# Altium PCB psu-usb.PcbDoc
Units mm, origin at the board's own origin, x right, y up, seen from the top; angles counter-clockwise.
Board outline 19.5 x 41.25 mm, 2 copper layers (Top Layer, Bottom Layer), stack 1.581 mm thick; 6 components, 4 nets, 22 pads, 25 vias.
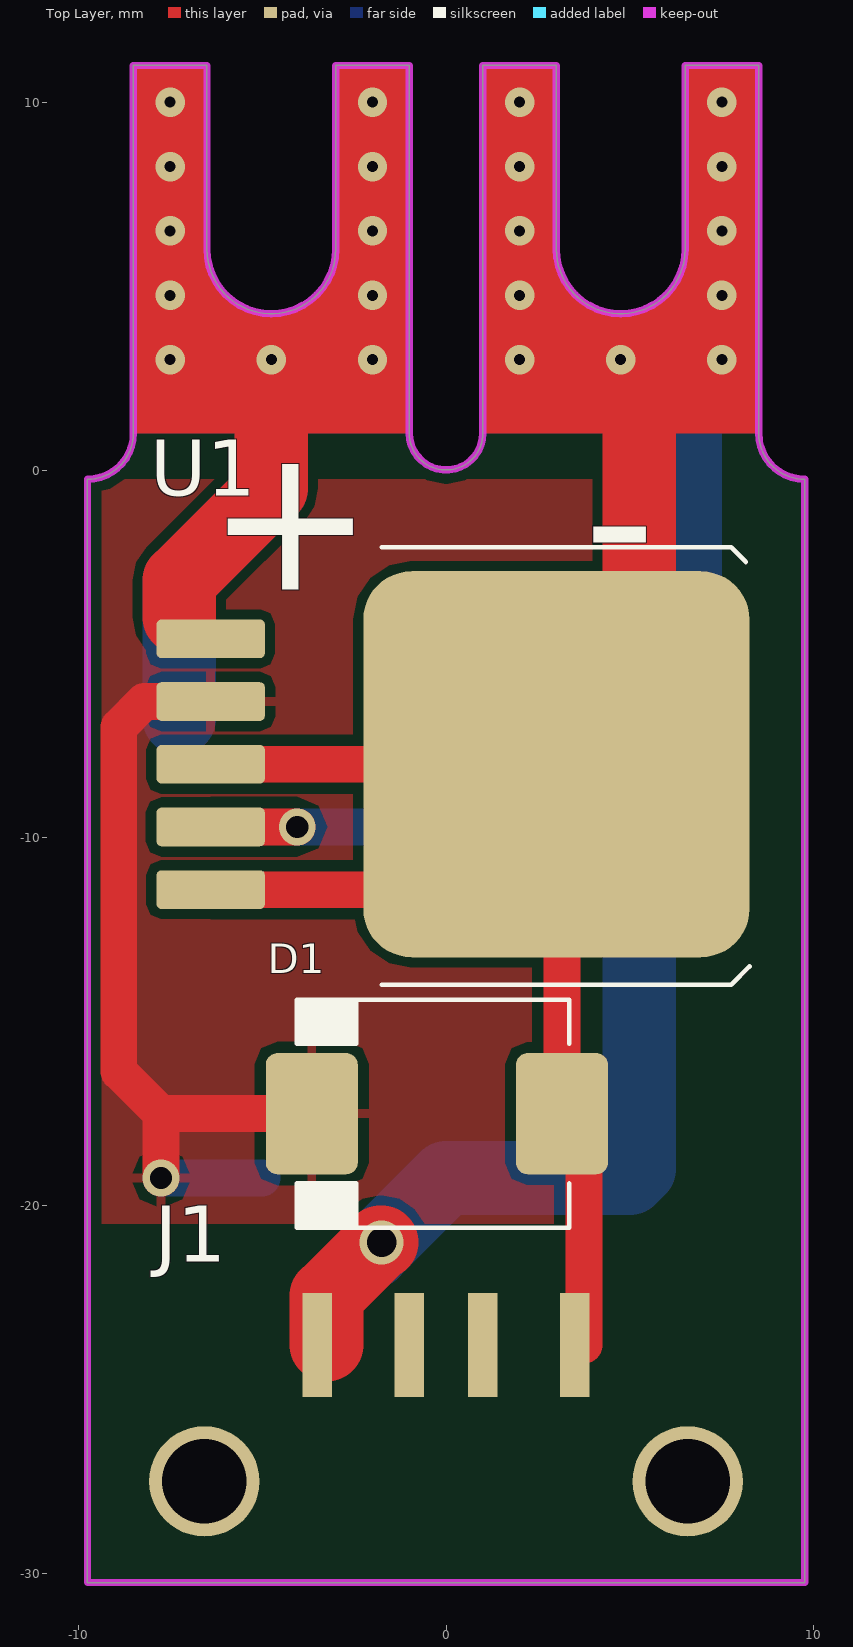
[diagram p0: Top Layer view]
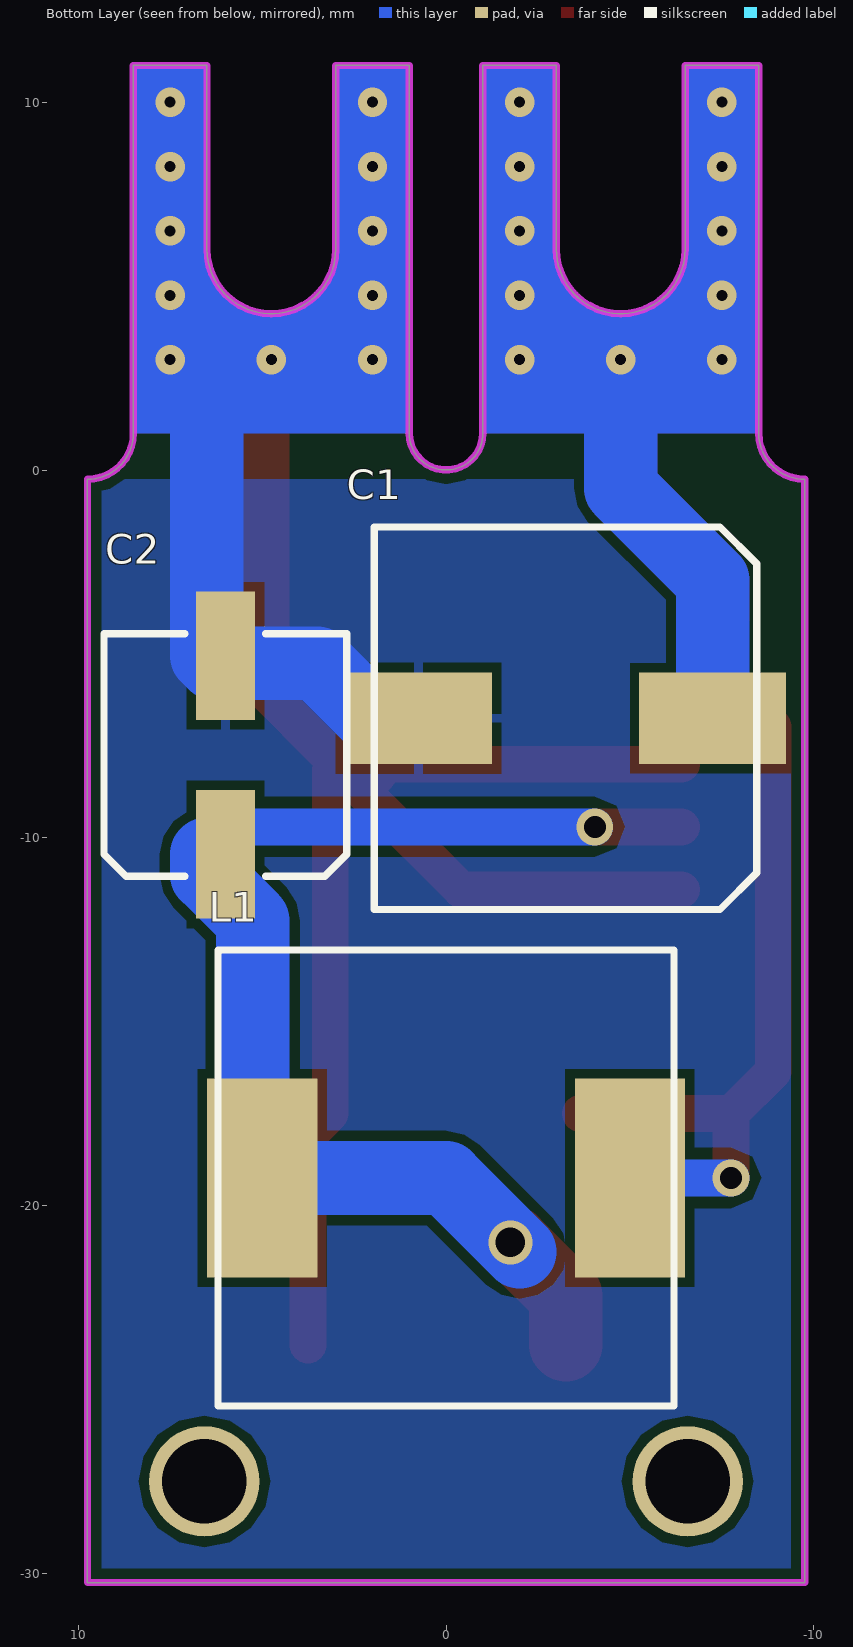
[diagram p1: Bottom Layer view, seen from below]

## Layer stack, top to bottom
Top Solder: solder mask 0.0102, Solder Resist, Dk 3.5
Top Layer: signal copper 0.0356
Dielectric1: dielectric 1.51, FR-4, Dk 4.8
Bottom Layer: signal copper 0.0356
Bottom Solder: solder mask 0.0102, Solder Resist, Dk 3.5

## Board outline
-9.75,-30.25 -9.75,-0.25 ccw(c-9.75,1) -8.5,1 -8.5,11 -6.5,11 -6.5,6 ccw(c-4.75,6) -3,6 -3,11 -1,11 -1,1 ccw(c0,1) 1,1 1,11 3,11 3,6 ccw(c4.75,6) 6.5,6 6.5,11 8.5,11 8.5,1 ccw(c9.75,1) 9.75,-0.25 9.75,-30.25

## Design rules (kind name [scope] priority, off if disabled: settings)
Clearance [All] p1: gap=0.254
FabricationTestPointUsage TestPointUsage [All] p1: valid=0 allowmultiple=FALSE
FabricationTestpoint Testpoint [All] p1: side=3 testpointundercomponent=TRUE minsize=1.016 maxsize=2.54 preferedsize=1.524 minholesize=0 maxholesize=1.016 preferedholesize=0.813 testpointgrid=0.025 allowsidetop=TRUE allowsidebottom=TRUE usegrid=TRUE gridtolerance=0
PlaneClearance [All] p1: clearance=0
PolygonConnect [All] p1: connectstyle=Relief reliefconductorwidth=0.254 reliefentries=4 polygonreliefangle="90 Angle" airgapwidth=0.254
RoutingVias [All] p1: holewidth=0.711 width=1.27 viastyle="Through Hole" minholewidth=0.711 minwidth=1.27 maxholewidth=0.711 maxwidth=1.27
SilkToSolderMaskClearance SilkscreenOverComponentPads [IsPad] p1: minsilkscreentomaskgap=0.254 clearancetoexposedcopper=TRUE
SolderMaskExpansion [All] p1: expansion=0.102
Width [All] p1: maxlimit=2 minlimit=0.25 preferedwidth=0.25 minimp=50.000000 maximp=50.000000 favimp=50.000000
26 further rules are at their usual default settings.

## Components (designator, comment, footprint, x,y, rotation, side; value= is the part's Value field where it differs from the comment)
C1 "470uF 35V" UCL1V471MNL1GS -7.25,-6.75 r270 bottom
C2 "220uF 6.3V" UUD0J221MCL1GS 6,-7.75 r0 bottom
D1 "40V 3A" DO-214AB -0.25,-17.5 r180 top
J1 "USB A Socket" "USB A Socket - 1002-002-01100" 0,-24 r0 top
L1 "22uH" CDRH127/LDNP 0,-19.25 r270 bottom
U1 "5V 3A Buck Regulator AP3003" TO-263-5 -0.25,-8 r0 top (schematic designator U?)

## Footprints (in the part's own frame and the unit in brackets; to place one, negate y for a bottom-side part, rotate by r counter-clockwise, add the part's x,y. Pads: shape width x height; smd on the part's side, far side on the other; paste and mask are expansions set on the pad)
CDRH127/LDNP [mm]
  rect 5.4x3 smd: 0(0,5) 1(0,-5)
  silkscreen extent -6.2,-6.2 6.2,6.2, body extent -6.2,-6.2 6.2,6.2, height 8
DO-214AB [mm] "JEDEC DO214 variation AB. SMC"
  round 0.508 on Mech15: 0(0,0)
  rrect25% 2.5x3.3 smd: A(-3.4,0) K(3.4,0)
  silkscreen extent -3.6,-3.1 3.8,3.1, body extent -3.98,-2.98 4.05,2.98, height 2.62
TO-263-5 [mm] "D-PAK/TO-263-5; 5 Leads; Body 14.4 (inc. leads) x 10.4 mm (LxW max)"
  round 0.5 on Mech15: 0(0,0)
  rrect25% 2.95x1.05 smd: 1(-6.15,3.41) 2(-6.15,1.705) 3(-6.15,0) 4(-6.15,-1.705) 5(-6.15,-3.41)
  rrect25% 10.5x10.5 smd: 3(3.25,0)
  silkscreen extent -1.5,-6 8.5,5.9, body extent -6.73,-5.08 7.29,5.08, height 4.56
UCL1V471MNL1GS [mm]
  rect 2.5x4 smd: 1(0,0) 2(0,-8)
  silkscreen extent -5.2,-9.2 5.2,1.2, body extent -5.25,-9.25 5.25,1.25, height 13.5
"USB A Socket - 1002-002-01100" [mm]
  round 3 hole 2.3: 0(-6.57,-3.5) 0(6.57,-3.5)
  rect 0.8x2.82 smd: 1(-3.5,0.21) 2(-1,0.21) 3(1,0.21) 4(3.5,0.21)
  body extent -7.08,-9.1 7.54,0.4, height 6.62
UUD0J221MCL1GS [mm]
  rect 1.6x3.5 smd: 1(0,2.7) 2(0,-2.7)
  silkscreen extent -3.3,-3.3 3.3,3.3, body extent -3.5,-3.4 3.4,3.4, height 5.8

## Part data
C1: library part "CAPE 470uF 35V UCL1V471MNL1GS"
C2: library part "CAPE 220uF 6.3V UUD0J221MCL1GS"
D1: library part B340-13-F
L1: library part CDRH127/LDNP-220MC

## Via types
v1: diameter 0.8, hole 0.3, Top Layer to Bottom Layer, 22 vias
v2: diameter 1, hole 0.6, Top Layer to Bottom Layer, 2 vias
v3: diameter 1.2, hole 0.8, Top Layer to Bottom Layer, 1 vias

## Nets (pads, with @x,y where several pads share a name; then routed paths per layer and width w, separated by ;. In a path a pad name is that pad's centre, name@x,y a point inside that pad or via, vN(x,y) a via of type N, cw(c..) or ccw(c..) an arc to the next point about the centre after c; other vN are vias at no path point)
GND: C1.2 C2.2 D1.A J1.4 U1.3 U1.5 | length 59.8
  Top Layer w1: U1.5 -0.41,-11.41 3,-8 3.15,-8.15 D1.A 3.75,-18.1 J1.4@3.75,-23.79 ; U1.3@-6.4,-8 U1.3@2.25,-8
  Top Layer w2: U1.3@2.25,-8 5.25,-5 5.25,2
  Bottom Layer w2: C1.2 2,-6.75 3.5,-5.25 6.3,-5.25 6.5,-5.05 6.5,1.5
  other v1: 2,3 4.75,3 7.5,3 2,4.75 7.5,4.75 2,6.5 7.5,6.5 2,8.25 7.5,8.25 2,10 7.5,10
NetC2_1: C2.1 J1.1 L1.1 U1.4 | length 33.9
  Top Layer w1: U1.4 v2(-4.045,-9.705)
  Top Layer w2: J1.1@-3.25,-23.79 -3.25,-22.457 -1.793,-21 v3(-1.75,-21)
  Bottom Layer w1: v2(-4.045,-9.705) 5.755,-9.705 C2.1@6.5,-10.45
  Bottom Layer w2: v3@-2,-21.25 0,-19.25 L1.1 5.25,-19 5.25,-12.25 6.5,-11 C2.1@6.5,-10.45
NetD1_K: D1.K L1.0 U1.2 | length 22.4
  Top Layer w1: v2(-7.75,-19.25) -7.75,-17.5 ; U1.2 -8.205,-6.295 -8.896,-6.986 -8.896,-16.354 -7.75,-17.5 ; D1.K -7.75,-17.5
  Bottom Layer w1: v2(-7.75,-19.25) L1.0
VCC: C1.1 U1.1 | length 17.1
  Top Layer w2: -7.25,-4 -7.25,-3 -4.75,-0.5 -4.75,2.25
  Bottom Layer w2: C1.1 -7.25,-3 -4.75,-0.5 -4.75,2
  other v1: -7.5,3 -4.75,3 -2,3 -7.5,4.75 -2,4.75 -7.5,6.5 -2,6.5 -7.5,8.25 -2,8.25 -7.5,10 -2,10
pads on no net: D1.0 J1.0 J1.2 J1.3 U1.0

## Polygon pours and split planes (outlines as drawn)
GND on Bottom Layer "GND" (solid, remove dead copper, pour order 0): -9.75,-0.25 10.25,-0.25 10.25,-30.25 -9.75,-30.25
NetD1_K on Top Layer "GND" (solid, remove dead copper, pour order 2): -9.75,-0.25 10.25,-0.25 10.25,-20.5 -9.75,-20.5

## Keep-outs
Keep-Out Layer:
  the board outline again, w0.2

## Other copper
Top Layer:
  region net GND: 1,1 1,11 3,11 3,6 ccw(c4.75,6) 6.5,6 6.5,11 8.5,11 8.5,1
  region net VCC: -8.5,1 -8.5,11 -6.5,11 -6.5,6 ccw(c-4.75,6) -3,6 -3,11 -1,11 -1,1
Bottom Layer:
  region net GND: 8.5,1 8.5,11 6.5,11 6.5,6 cw(c4.75,6) 3,6 3,11 1,11 1,1
  region net VCC: -1,1 -1,11 -3,11 -3,6 cw(c-4.75,6) -6.5,6 -6.5,11 -8.5,11 -8.5,1

## Silkscreen, mask and mechanical layers (free items; w line width, h text height)
Top Overlay:
  text "+" at -6.5,-3.25 h5
  text "-" at 3.75,-3.25 h5
Top Solder:
  region: 1,1 1,11 3,11 3,6 ccw(c4.75,6) 6.5,6 6.5,11 8.5,11 8.5,1
  region: -8.5,1 -8.5,11 -6.5,11 -6.5,6 ccw(c-4.75,6) -3,6 -3,11 -1,11 -1,1
Bottom Solder:
  region: 8.5,1 8.5,11 6.5,11 6.5,6 cw(c4.75,6) 3,6 3,11 1,11 1,1
  region: -1,1 -1,11 -3,11 -3,6 cw(c-4.75,6) -6.5,6 -6.5,11 -8.5,11 -8.5,1
Mechanical 13:
  lines w0.2: -9.75,-0.25 9.75,-0.25
Mechanical 16:
  drawing of 1874 lines, arcs and shapes, not listed
  text "1" at -102.254,85.611 h1.78
  text "2" at -29.61,85.611 h1.78
  text "3" at 43.542,85.611 h1.78
  text "4" at 116.44,85.611 h1.78
  text "A" at -136.595,62.599 h1.78
  text "A" at 150.425,62.599 h1.78
  text "B" at -136.595,14.542 h1.78
  text "B" at 150.425,14.542 h1.78
  text "C" at -136.595,-33.972 h1.78
  text "C" at 150.425,-33.972 h1.78
  text "ENGINEER:" at 35.49,-70.98 h1.14
  text "TITLE:" at 73.59,-70.98 h1.14
  text "PCB DESIGNER:" at 35.49,-78.473 h1.14
  text "D" at -136.595,-81.978 h1.78
  text "D" at 150.425,-81.978 h1.78
  text "DATE:" at 35.49,-86.22 h1.14
  text "PART NO.:" at 73.59,-86.22 h1.14
  text "REV:" at 126.93,-86.22 h1.14
  text "Altium Limited" at 2.47,-88.76 h1.78
  text ".PRINT_DATE" at 36.76,-89.268 h1.78
  text "12a Rodborough Rd" at 2.47,-91.3 h1.78
  text "Frenchs Forest" at 2.47,-93.84 h1.78
  text "FILE NAME:" at 35.49,-93.84 h1.14
  text "DWG NO:" at 73.59,-93.84 h1.14
  text "SCALE:" at 126.93,-93.84 h1.14
  text "NSW 2086" at 2.47,-96.38 h1.78
  text ".PCB_FILE_NAME_NO_PATH" at 36.76,-96.888 h1.78
  text "1" at -102.254,-102.349 h1.78
  text "2" at -29.61,-102.349 h1.78
  text "3" at 43.542,-102.349 h1.78
  text "4" at 116.44,-102.349 h1.78

## Dimensions
-6.5,11 to -3,11 on Mechanical 1
-8.5,11 to 8.5,11 on Mechanical 1
-8.5,11 to -1,11 on Mechanical 1
-8.5,11 to -9.75,-30.25 on Mechanical 1
9.75,-0.25 to -9.75,-30.25 on Mechanical 1
-9.75,-30.25 to 9.75,-30.25 on Mechanical 1